# EAGLE board bpod_stepper_1.1 (EAGLE 9.6.2)
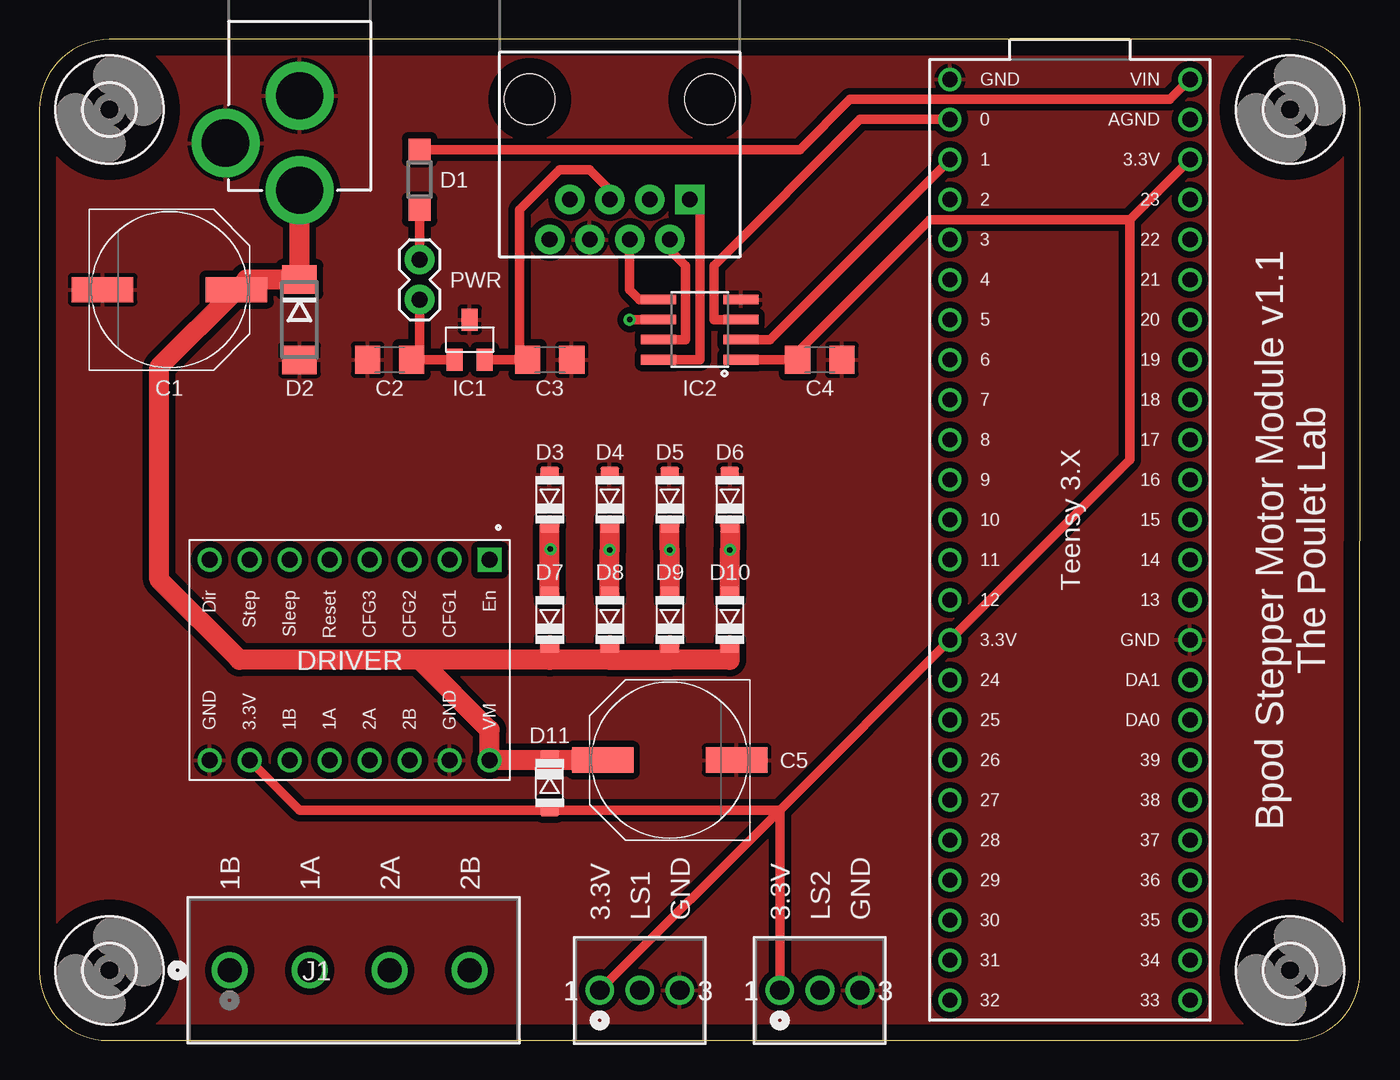
[diagram p0: board, top side]
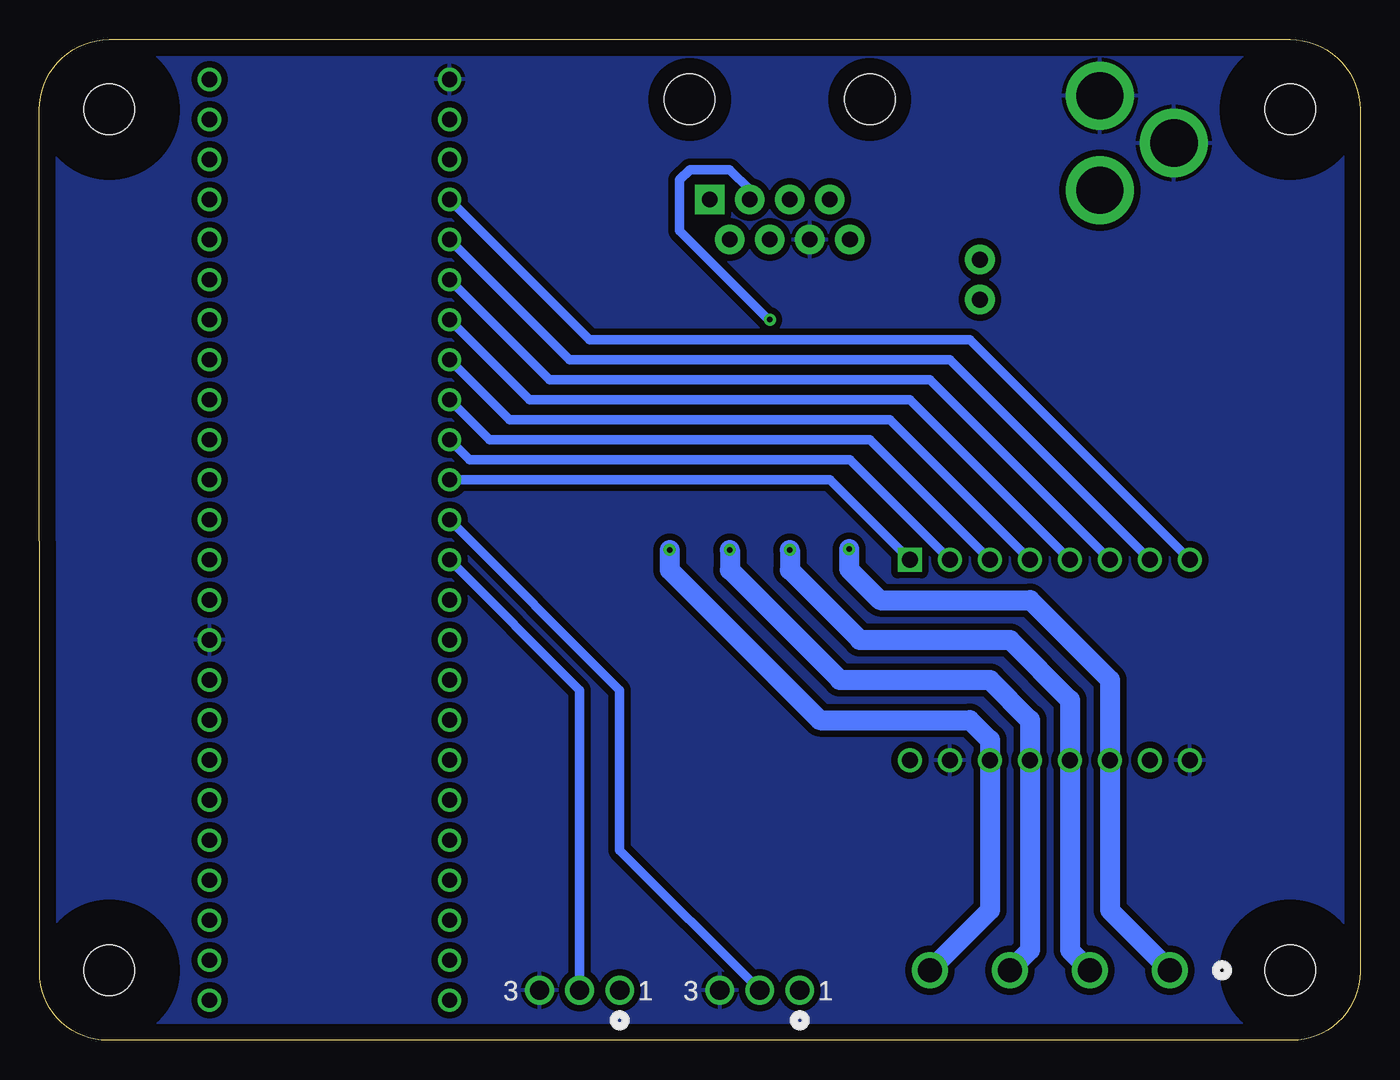
[diagram p1: board, bottom side, seen from below]

Size 83.82 x 63.5 mm. Coordinates in mm from the lower left corner, seen from the top.
Outline: 79.38,63.5 4.45,63.5 arc90 0,59.05 0,4.34 arc90 4.34,0 79.5,0 arc90 83.8,4.3 83.82,59.05 arc90 79.38,63.5
Copper layers (1*16): Top 0.035mm / dielectric 1.5mm / Bottom 0.035mm
Design rules "default": minimum track width 6mil, minimum drill 0.35mm, track to track 6mil, track to pad 6mil, pad to pad 6mil, via to via 6mil, smd to smd 6mil, copper to edge 40mil, drill to drill 6mil, minimum pad ring 10mil, minimum via ring 8mil, stop-mask expansion 4mil, vias tented up to drill 0mil, thermal gap 10mil

## Footprints (pad centres in the part's own frame; a part is rotated, then mirrored left to right if it is on the bottom)
PANASONIC_G = smd 3.9 x 1.6: + 4.25,0; - -4.25,0
1206@1 = smd 1.6 x 1.8: 1 -1.4,0; 2 1.4,0
SOD123 = smd 1.4 x 1.4: A 1.9,0; C -1.9,0
DO214AA = smd 1.8 x 2.2: A 2.55,0; C -2.55,0
SOD123' = smd 1.2 x 1: A 0,-1.6; C 0,1.6
MODULE_A4988_STEPPER_MOTOR_DRIVER_CARRIER = drill 1.02 square: 1 -6.35,8.89 | drill 1.02: 2 -6.35,6.35; 3 -6.35,3.81; 4 -6.35,1.27; 5 -6.35,-1.27; 6 -6.35,-3.81; 7 -6.35,-6.35; 8 -6.35,-8.89; 9 6.35,-8.89; 10 6.35,-6.35; 11 6.35,-3.81; 12 6.35,-1.27; 13 6.35,1.27; 14 6.35,3.81; 15 6.35,6.35; 16 6.35,8.89
SOT-23-3 = smd 1.016 x 1.397: 1 -0.953,-1.27; 2 0.953,-1.27; 3 0,1.27
SO08 = smd 0.61 x 2.21: 1 -1.905,-2.616; 2 -0.635,-2.616; 3 0.635,-2.616; 4 1.905,-2.616; 5 1.905,2.616; 6 0.635,2.616; 7 -0.635,2.616; 8 -1.905,2.616
CONN4_282841-4_TEC = drill 1.524 pad 2.032: 1 0,0; 2 5.08,0; 3 10.16,0; 4 15.24,0
POWER_JACK_PTH = drill 2.997 pad 4.318: GND 0,7.7; GNDBREAK 4.7,10.7; PWR 0,13.7
1X02 = drill 1.016 pad 1.88: 1 0,0; 2 2.54,0
CONN_282834-3_TYC = drill 1.219 pad 1.727: 1 0,0; 2 2.54,0; 3 5.08,0
TEENSY_3.6_DIL = drill 0.965: 0 -7.62,25.4; 1 -7.62,22.86; 2 -7.62,20.32; 3 -7.62,17.78; 3.3V 7.62,22.86; 3.3V3 -7.62,-7.62; 4 -7.62,15.24; 5 -7.62,12.7; 6 -7.62,10.16; 7 -7.62,7.62; 8 -7.62,5.08; 9 -7.62,2.54; 10 -7.62,0; 11 -7.62,-2.54; 12 -7.62,-5.08; 13 7.62,-5.08; 14/A0 7.62,-2.54; 15/A1 7.62,0; 16/A2 7.62,2.54; 17/A3 7.62,5.08; 18/A4 7.62,7.62; 19/A5 7.62,10.16; 20/A6 7.62,12.7; 21/A7 7.62,15.24; 22/A8 7.62,17.78; 23/A9 7.62,20.32; 24 -7.62,-10.16; 25 -7.62,-12.7; 26 -7.62,-15.24; 27 -7.62,-17.78; 28 -7.62,-20.32; 29 -7.62,-22.86; 30 -7.62,-25.4; 31/A12 -7.62,-27.94; 32/A13 -7.62,-30.48; 33/A14 7.62,-30.48; 34/A15 7.62,-27.94; 35/A16 7.62,-25.4; 36/A17 7.62,-22.86; 37/A18 7.62,-20.32; 38/A19 7.62,-17.78; 39/A20 7.62,-15.24; A21 7.62,-12.7; A22 7.62,-10.16; AGND 7.62,25.4; GND -7.62,27.94; GND1 7.62,-7.62; VIN 7.62,27.94
RJ45-8 = drill 1 pad 1.88 square: 1 -4.445,6.35 | drill 1 pad 1.88: 2 -3.175,8.89; 3 -1.905,6.35; 4 -0.635,8.89; 5 0.635,6.35; 6 1.905,8.89; 7 3.175,6.35; 8 4.445,8.89 | hole 3.2: -5.715,0; 5.715,0
3,2 = hole 3.2: 0,0

## Placement (x,y rotation side)
C1  [PANASONIC_G]  8.26,47.62 0 top
C2  0.1uf  [1206@1]  22.23,43.18 0 top
C3  0.1uf  [1206@1]  32.38,43.18 180 top
C4  0.1uf  [1206@1]  49.53,43.18 0 top
C5  [PANASONIC_G]  40.01,17.78 180 top
D1  MBR0520LT  [SOD123]  24.13,54.61 270 top
D2  [DO214AA]  16.51,45.72 270 top
D3  S310FA  [SOD123']  32.38,34.29 180 top
D4  S310FA  [SOD123']  36.2,34.29 180 top
D5  S310FA  [SOD123']  40.01,34.29 180 top
D6  S310FA  [SOD123']  43.81,34.29 180 top
D7  S310FA  [SOD123']  32.38,26.67 180 top
D8  S310FA  [SOD123']  36.2,26.67 180 top
D9  S310FA  [SOD123']  40.01,26.67 180 top
D10  S310FA  [SOD123']  43.81,26.67 180 top
D11  S310FA  [SOD123']  32.38,16.32 0 top
DRIVER  A4988_STEPPER_MOTOR_DRIVER_CARRIER  [MODULE_A4988_STEPPER_MOTOR_DRIVER_CARRIER]  19.68,24.13 270 top
IC1  LM3480-5.0  [SOT-23-3]  27.3,44.45 0 top
IC2  SN65HVD31DR  [SO08]  41.91,45.09 90 top
J1  282841-4  [CONN4_282841-4_TEC]  12.06,4.45 0 top
J8  POWER_JACK  [POWER_JACK_PTH]  16.51,67.63 180 top
PWR  [1X02]  24.13,46.99 90 top
SENSOR1  282834-3  [CONN_282834-3_TYC]  35.56,3.17 0 top
SENSOR2  282834-3  [CONN_282834-3_TYC]  46.99,3.17 0 top
U$1  TEENSY_3.6_DIL  [TEENSY_3.6_DIL]  65.41,33.02 0 top
U$2  RJ45-8PTH  [RJ45-8]  36.83,59.69 180 top
U$7  [3,2]  4.45,4.45 0 top
U$8  [3,2]  4.45,59.05 0 top
U$9  [3,2]  79.38,59.05 0 top
U$10  [3,2]  79.38,4.45 0 top

## Library data of the parts
C1 C5 = rcl; SPICEPREFIX: C
C2-C4 = SparkFun-Capacitors
D1 D2 = diode
D3-D11 = we-rcl
DRIVER = A4988_STEPPER_MOTOR_DRIVER_CARRIER; AVAILABILITY: Unavailable; DESCRIPTION: Stepper Motor Driver; MF: Pololu; MP: A4988 STEPPER MOTOR DRIVER CARRIER; PACKAGE: None; PRICE: None
IC1 = regulators
IC2 = Joshparts4
J1 = TERMI-BLOK PCB MOUNT 4P. 5; BUILT_BY: SunStream; COPYRIGHT: Copyright (C) 2018 Accelerated Designs. All rights reserved; DATASHEET: https://www.te.com/commerce/DocumentDelivery/DDEController?Action=showdoc&DocId=Customer+Drawing%7F282841%7FH6%7Fpdf%7FEnglish%7FENG_CD_282841_H6.pdf%7F282841-4; DESCRIPTION: TERMINAL BLOCK, PCB MOUNT, W/INTERLOCK, 5.08MM PITCH; MANUFACTURER_PART_NUMBER: 282841-4; SOURCELIBRARY: TE_Connectivity_600_Part_Delivery_14_2020-03-09; VENDOR: TE Connectivity
J8 = SparkFun-Connectors; PROD_ID: CONN-08197
PWR = SparkFun-Connectors
SENSOR1 SENSOR2 = 254mm 3pin Schraubterminal; BUILT_BY: EMA_UL_Team; COPYRIGHT: Copyright (C) 2016 Accelerated Designs. All rights reserved; MANUFACTURER_PART_NUMBER: 282834-3; SOURCELIBRARY: Tyco_2012-06-25; VENDOR: TE Connectivity
U$1 = Teensy_3_and_LC_Series_Boards_v1.4
U$2 = SparkFun
U$7-U$10 = holes

## Nets
1A: D4.C D8.A DRIVER.12 J1.2
1B: D3.C D7.A DRIVER.11 J1.1
2A: D5.C D9.A DRIVER.13 J1.3
2B: D6.C D10.A DRIVER.14 J1.4
3.3V: C4.1 D11.A DRIVER.10 IC2.1 SENSOR1.1 SENSOR2.1 U$1.3.3V U$1.3.3V3
+5V: D1.C U$1.VIN
AGND: U$1.AGND
CFG1: DRIVER.2 U$1.8
CFG2: DRIVER.3 U$1.7
CFG3: DRIVER.4 U$1.6
DIRECTION: DRIVER.8 U$1.2
ENABLE: DRIVER.1 U$1.9
GND: C1.- C2.1 C3.1 C4.2 C5.- D2.A D3.A D4.A D5.A D6.A DRIVER.9 DRIVER.15 IC1.3 IC2.4 J8.GND J8.GNDBREAK SENSOR1.3 SENSOR2.3 U$1.GND U$1.GND1 U$2.6
N$7: IC2.8 U$2.1
N$8: IC2.7 U$2.2
N$9: IC2.6 U$2.3
N$10: IC2.5 U$2.4
N$14: C2.2 IC1.1 PWR.1
N$18: D1.A PWR.2
N$24: C3.2 IC1.2 U$2.5
RESET: DRIVER.5 U$1.5
RX1: IC2.3 U$1.0
SLEEP: DRIVER.6 U$1.4
STEP: DRIVER.7 U$1.3
SWITCH1: SENSOR1.2 U$1.10
SWITCH2: SENSOR2.2 U$1.11
TX1: IC2.2 U$1.1
VMOTOR: C1.+ C5.+ D2.C D7.C D8.C D9.C D10.C D11.C DRIVER.16 J8.PWR

## Tracks (layer width: path | path; a pad name or v marks a point on that pad's centre or on a via)
1A  (via drill 0.35)
  Top 1.27: D8.A v36.2,31.11 D4.C
  Bottom 1.27: v36.2,31.11 36.2,29.84 31.75,25.4 22.23,25.4 18.41,21.59 DRIVER.12 18.41,5.71 J1.2
1B  (via drill 0.35)
  Top 0.61: D3.C 32.43,32.64 v32.43,31.16
  Top 1.27: D7.A D3.C
  Bottom 1.27: v32.43,31.16 32.43,29.89 30.46,27.92 20.94,27.92 15.88,22.86 DRIVER.11 15.88,8.26 J1.1
2A  (via drill 0.35)
  Top 1.27: D5.C v40.01,31.11 D9.A
  Bottom 1.27: v40.01,31.11 40.01,29.84 33.02,22.86 23.5,22.86 20.95,20.32 DRIVER.13 20.95,5.71 J1.3
2B  (via drill 0.35)
  Top 1.27: D6.C v43.81,31.11 D10.A
  Bottom 1.27: v43.81,31.11 43.81,29.84 34.29,20.32 24.77,20.32 23.5,19.05 DRIVER.14 23.5,8.26 J1.4
3.3V
  Top 0.61: 32.38,14.61 46.99,14.61 | D11.A 32.38,14.61 | 32.38,14.61 16.51,14.61 DRIVER.10 | U$1.3.3V 69.22,52.07 | 46.99,14.61 U$1.3.3V3 69.22,36.83 69.22,52.07 | IC2.1 C4.1 48.13,43.69 56.52,52.07 69.22,52.07 | SENSOR2.1 46.99,14.61 | SENSOR1.1 46.99,14.61
+5V
  Top 0.61: D1.C 48.26,56.52 51.44,59.69 71.75,59.69 U$1.VIN
CFG1
  Bottom 0.61: DRIVER.2 32.38,36.83 56.52,36.83 U$1.8
CFG2
  Bottom 0.61: DRIVER.3 31.11,38.1 55.24,38.1 U$1.7
CFG3
  Bottom 0.61: U$1.6 53.98,39.37 29.84,39.37 DRIVER.4
DIRECTION
  Bottom 0.61: U$1.2 48.9,44.45 24.77,44.45 DRIVER.8
ENABLE
  Bottom 0.61: U$1.9 33.66,35.56 DRIVER.1
GND
  pour Bottom (isolate 0.406): 79.38,62.87 4.45,62.87 arc90 0.64,59.05 0.64,4.45 arc90 4.45,0.64 79.38,0.64 arc90 83.19,4.45 83.19,59.05 arc90
  pour Top (isolate 0.406): 0.64,4.45 0.64,59.05 arc-90 4.45,62.87 79.38,62.87 arc-90 83.19,59.05 83.19,4.45 arc-90 79.38,0.64 4.45,0.64 arc-90
N$7
  Top 0.61: IC2.8 41.91,43.18 41.91,52.7 U$2.1
N$8
  Top 0.61: IC2.7 41.02,44.45 41.02,49.15 40.01,50.16 U$2.2
N$9  (via drill 0.35)
  Top 0.61: IC2.6 v37.47,45.72
  Bottom 0.61: v37.47,45.72 37.54,45.72 43.18,51.36 43.18,54.6 42.53,55.24 40.02,55.24 38.73,53.96 U$2.3
N$10
  Top 0.61: IC2.5 38.1,46.99 37.47,47.62 U$2.4
N$14
  Top 0.61: PWR.1 24.13,43.18 C2.2 IC1.1
N$18
  Top 0.61: D1.A PWR.2
N$24
  Top 0.61: IC1.2 C3.2 30.48,43.18 30.48,52.7 33.02,55.24 34.92,55.24 36.2,53.98 U$2.5
RESET
  Bottom 0.61: U$1.5 52.7,40.64 28.57,40.64 DRIVER.5
RX1
  Top 0.61: U$1.0 52.07,58.42 42.8,49.15 42.8,45.72 IC2.3
SLEEP
  Bottom 0.61: U$1.4 51.44,41.91 27.3,41.91 DRIVER.6
STEP
  Bottom 0.61: DRIVER.7 26.04,43.18 50.16,43.18 U$1.3
SWITCH1
  Bottom 0.61: U$1.10 46.99,22.23 46.99,12.06 SENSOR1.2
SWITCH2
  Bottom 0.61: U$1.11 49.53,22.23 SENSOR2.2
TX1
  Top 0.61: U$1.1 46.35,44.45 IC2.2
VMOTOR
  Top 0.152: D2.C
  Top 0.254: D11.C 32.38,17.78
  Top 1.27: D2.C J8.PWR | D7.C 32.38,24.13 | 32.38,24.13 24.13,24.13 | 24.13,24.13 12.7,24.13 7.61,29.22 7.61,42.73 C1.+ 13.14,48.26 D2.C | D10.C 43.81,24.13 40.01,24.13 | D8.C 36.2,24.13 | 36.2,24.13 32.38,24.13 | 36.2,24.13 40.01,24.13 | 40.01,24.13 D9.C | 24.13,24.13 28.57,19.68 DRIVER.16 32.38,17.78 C5.+

## Text on the board
tNames: GND | VIN | 0 | AGND | 1 | 3.3V | 2 | 23 | 3 | 22 | 4 | 21 | 5 | 20 | 6 | 19 | 7 | 18 | 8 | 17 | 9 | 16 | 10 | Teensy 3.X | 15 | Bpod Stepper Motor Module v1.1 / The Poulet Lab | 11 | 14 | Dir | Step | Sleep | Reset | CFG3 | CFG2 | CFG1 | En | 12 | 13 | 3.3V | GND | 24 | DA1 | GND | 3.3V | 1B | 1A | 2A | 2B | GND | VM | 25 | DA0 | 26 | 39 | 27 | 38 | 28 | 37 | 1B | 1A | 2A | 2B | 29 | 36 | 3.3V | LS1 | GND | 3.3V | LS2 | GND | 30 | 35 | 31 | 34 | 32 | 33